# EAGLE board basic-maschinen (EAGLE 6.6.0)
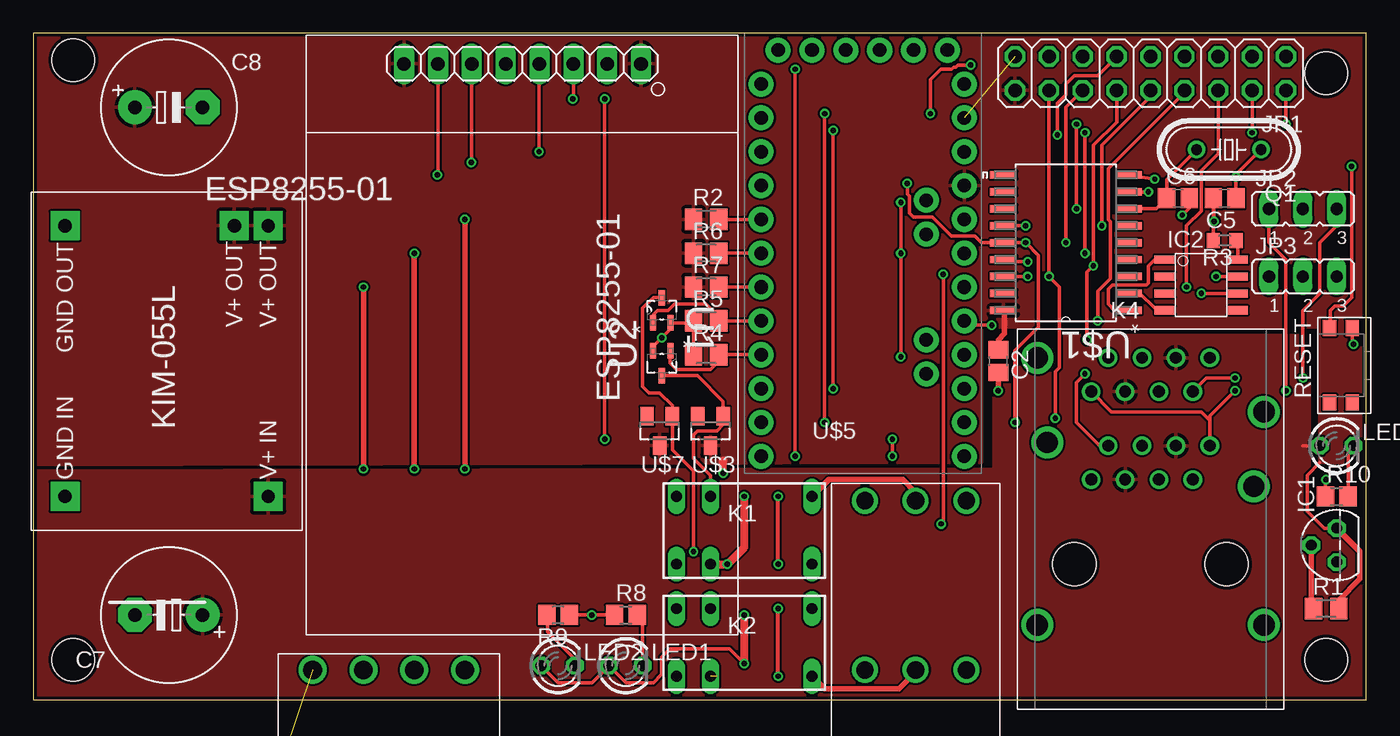
[diagram p0: board, top side]
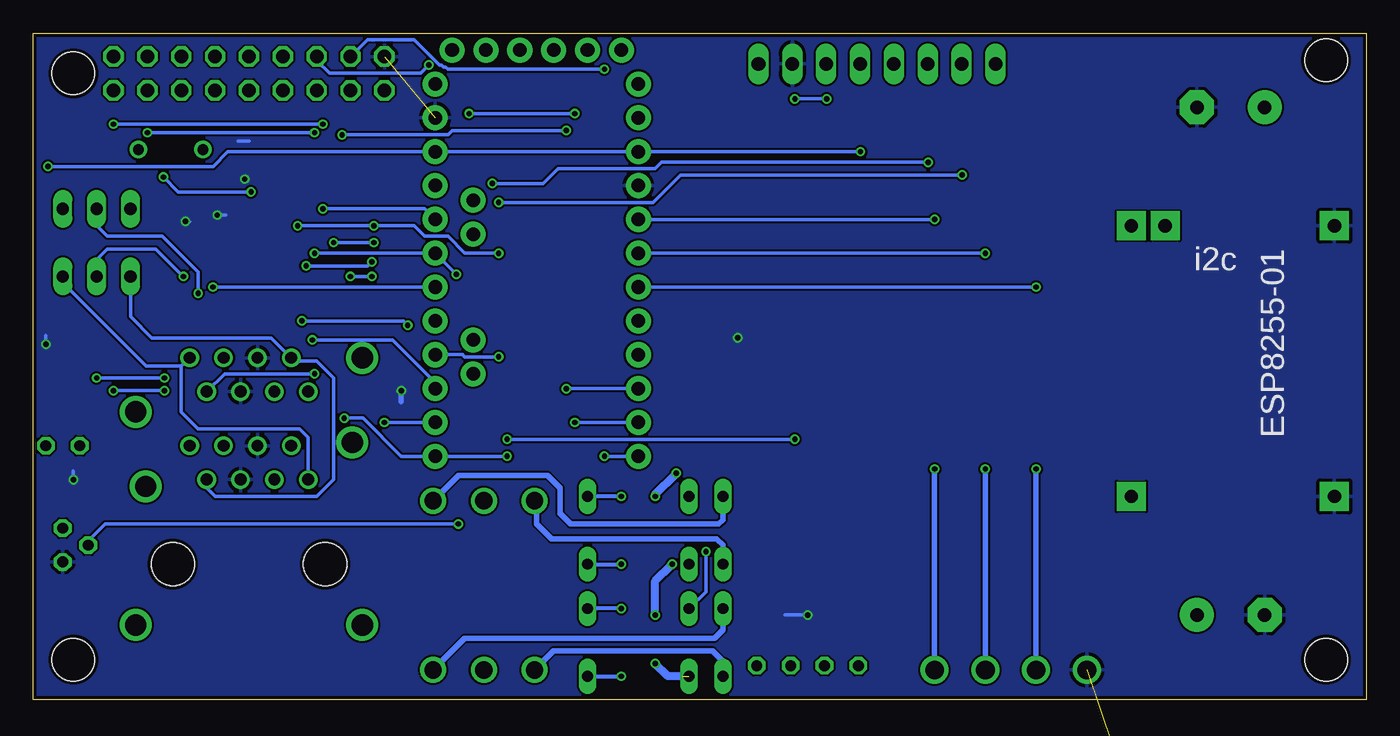
[diagram p1: board, bottom side, seen from below]

Size 100 x 50 mm. Coordinates in mm from the lower left corner, seen from the top.
Outline: 0,50 0,0 100,0 100,50 0,50
Copper layers (1*16): Top 0.035mm / dielectric 1.5mm / Bottom 0.035mm
Design rules "ITEADstudio_DRC": minimum track width 6mil, minimum drill 12mil, track to track 6mil, track to pad 6mil, pad to pad 6mil, via to via 6mil, smd to smd 0mil, copper to edge 10mil, drill to drill 10mil, minimum pad ring 10mil, minimum via ring 6mil, stop-mask expansion 2mil, vias tented up to drill 100mil, thermal gap 10mil
Net classes: 4 USBpair: width 0.254 mm, drill 0.406 mm, clearance 0.508 mm
Holes 3.2 mm at 97,47 97,3 3,3 3,48

## Footprints (pad centres in the part's own frame; a part is rotated, then mirrored left to right if it is on the bottom)
C0805 = smd 1.3 x 1.5: 1 -0.85,0; 2 0.85,0
E5-10,5 = drill 1.016 pad 2.54: + -2.54,0 | drill 1.016 pad 2.54 octagon: - 2.54,0
TO-92 = drill 0.813 pad 1.27 octagon: 1 -1.27,0; 2 0,1.905; 3 1.27,0
SO-8 = smd 0.61 x 1.524: 1 0,-0.203; 2 1.27,-0.203; 3 2.54,-0.203; 4 3.81,-0.203; 5 3.81,5.283; 6 2.54,5.283; 7 1.27,5.283; 8 0,5.283
691327310006 = drill 1.3: 1 0,0; 2 12.7,0; 3 0,3.81; 4 12.7,3.81; 5 0,7.62; 6 12.7,7.62
691322310004 = drill 1.4: 1 -3.81,0; 2 0,0; 3 3.81,0; 4 7.62,0
2X09 = drill 1.016 octagon: 1 -10.16,-1.27; 2 -10.16,1.27; 3 -7.62,-1.27; 4 -7.62,1.27; 5 -5.08,-1.27; 6 -5.08,1.27; 7 -2.54,-1.27; 8 -2.54,1.27; 9 0,-1.27; 10 0,1.27; 11 2.54,-1.27; 12 2.54,1.27; 13 5.08,-1.27; 14 5.08,1.27; 15 7.62,-1.27; 16 7.62,1.27; 17 10.16,-1.27; 18 10.16,1.27
JP2 = drill 0.914 long: 1 -2.54,0; 2 0,0; 3 2.54,0
G5V1 = drill 0.813 long: 1 -5.08,-2.54; 2 -2.54,-2.54; 5 5.08,-2.54; 6 5.08,2.54; 9 -2.54,2.54; 10 -5.08,2.54
615016240521 = drill 0.89: A1 -4.445,-1.27; A2 -3.175,1.27; A3 -1.905,-1.27; A4 -0.635,1.27; A5 0.635,-1.27; A6 1.905,1.27; A7 3.175,-1.27; A8 4.445,1.27; B1 4.445,7.87; B2 3.175,5.33; B3 1.905,7.87; B4 0.635,5.33; B5 -0.635,7.87; B6 -1.905,5.33; B7 -3.175,7.87; B8 -4.445,5.33 | drill 1.6: Z1 -8.505,-12.19; Z2 8.505,-12.19; Z3 7.745,-1.78; Z4 -7.745,1.52; Z5 8.505,3.81; Z6 -8.505,7.87 | hole 3.25: -5.715,-7.62; 5.715,-7.62
LED3MM = drill 0.813 octagon: A -1.27,0; K 1.27,0
KIM-055L = drill 1 pad 2.184 square: GNDIN -10.16,7.62; GNDOUT 10.16,7.62; V+IN -10.16,-7.62; V+OUT1 10.16,-5.08; V+OUT2 10.16,-7.62
HC49/S = drill 0.813: 1 -2.413,0; 2 2.413,0
M0805 = smd 1.3 x 1.6: 1 -0.95,0; 2 0.95,0
R0603 = smd 1 x 1.1: 1 -0.85,0; 2 0.85,0
R0805 = smd 1.3 x 1.5: 1 -0.85,0; 2 0.85,0
434351045816 = smd 1.2 x 1: 1 2.8,0.85; 2 2.8,-0.85; 3 -2.8,0.85; 4 -2.8,-0.85
SOT65P210X110-3N = smd 1.168 x 0.457: 1 -0.94,0.66; 2 -0.94,-0.66; 3 0.94,0
SOIC127P1034X264-18N = smd 1.981 x 0.559: 1 -4.699,5.08; 2 -4.699,3.81; 3 -4.699,2.54; 4 -4.699,1.27; 5 -4.699,0; 6 -4.699,-1.27; 7 -4.699,-2.54; 8 -4.699,-3.81; 9 -4.699,-5.08; 10 4.699,-5.08; 11 4.699,-3.81; 12 4.699,-2.54; 13 4.699,-1.27; 14 4.699,0; 15 4.699,1.27; 16 4.699,2.54; 17 4.699,3.81; 18 4.699,5.08
SOT23 = smd 1 x 1.4: 1 -0.95,-1.1; 2 0.95,-1.1; 3 0,1.1
1.44-128X128 = drill 1.016 long: 1 7.27,2.14; 2 9.81,2.14; 3 12.35,2.14; 4 14.89,2.14; 5 17.43,2.14; 6 19.97,2.14; 7 22.51,2.14; 8 25.05,2.14
ARDUINO_PRO_MINI = drill 1.016 pad 1.88: 1 -7.62,12.7; 2 -7.62,10.16; 3 -7.62,7.62; 4 -7.62,5.08; 5 -7.62,2.54; 6 -7.62,0; 7 -7.62,-2.54; 8 -7.62,-5.08; 9 -7.62,-7.62; 10 -7.62,-10.16; 11 -7.62,-12.7; 12 -7.62,-15.24; 13 7.62,-15.24; 14 7.62,-12.7; 15 7.62,-10.16; 16 7.62,-7.62; 17 7.62,-5.08; 18 7.62,-2.54; 19 7.62,0; 20 7.62,2.54; 21 7.62,5.08; 22 7.62,7.62; 23 7.62,10.16; 24 7.62,12.7; A4 4.763,1.429; A5 4.763,3.969; A6 4.763,-9.049; A7 4.763,-6.509; BLK -6.35,15.24; GND -3.81,15.24; GRN 6.35,15.24; RXI 1.27,15.24; TXO 3.81,15.24; VCC -1.27,15.24

## Placement (x,y rotation side)
C2  [C0805]  72.39,25.4 270 top
C5  [C0805]  89.38,37.62 180 top
C6  [C0805]  85.88,37.62 0 top
C7  [E5-10,5]  10.16,6.35 180 top
C8  [E5-10,5]  10.16,44.45 0 top
IC1  DS1820TO92  [TO-92]  97.79,11.59 90 top
IC2  MCP2551  [SO-8]  85.09,33.02 270 top
J1  [691327310006]  62.39,14.92 270 top
J2  [691322310004]  28.57,2.22 180 top
JP1  [2X09]  83.82,46.99 180 top
JP2  [JP2]  95.25,36.83 0 top
JP3  [JP2]  95.25,31.75 0 top
K1  G5V1  [G5V1]  53.34,12.7 0 top
K2  G5V1  [G5V1]  53.34,4.29 0 top
K4  615016240521  [615016240521]  83.82,17.78 0 top
LED1  [LED3MM]  44.45,2.54 0 top
LED2  [LED3MM]  39.37,2.54 0 top
LED3  [LED3MM]  -2.54,-64.77 0 top  (outside the outline)
LED9  [LED3MM]  97.79,19.05 0 top
MOD1  [KIM-055L]  10,25.4 90 top
Q1  [HC49/S]  89.69,41.27 180 top
R1  [M0805]  97,6.83 0 top
R2  [M0805]  50.48,36.04 0 top
R3  10k  [R0603]  89.38,34.45 180 top
R4  [M0805]  50.48,25.88 0 top
R5  [M0805]  50.48,28.42 0 top
R6  [M0805]  50.48,33.5 0 top
R7  [M0805]  50.48,30.96 0 top
R8  [R0805]  44.45,6.35 0 top
R9  [R0805]  39.37,6.35 180 top
R10  [R0805]  97.79,15.24 0 top
R11  [R0805]  -2.54,-69.85 0 top  (outside the outline)
RESET  434351045816  [434351045816]  98.11,25.08 90 top
U1  BSS138BK  [SOT65P210X110-3N]  47.15,25.24 270 top
U2  BSS138BK  [SOT65P210X110-3N]  47.15,29.21 90 top
U$1  MCP2515-I/SO  [SOIC127P1034X264-18N]  77.47,34.29 180 top
U$3  BAS21  [SOT23]  50.8,20.16 180 top
U$4  1.44-128X128  [1.44-128X128]  52.86,49.85 180 top
U$5  ARDUINO_PRO_MINI  [ARDUINO_PRO_MINI]  62.23,33.5 0 top
U$7  BAS21  [SOT23]  46.99,20.16 180 top

## Library data of the parts
C2 C5-C8 R1 R2 R4-R11 = schlager_passiv
IC1 = schlager_ics
IC2 = MYMCHIP
J1 J2 = Eagle_TERMINAL_BLOCKS_rev16a
JP1 = pinhead
JP2 JP3 = jumper
K1 K2 = relay; MPN: G5V-1-DC24; OC_FARNELL: 9949593; OC_NEWARK: 36M6377
K4 = Wuerth_Elektronik_eiCan_Communication_Connectors
LED1-LED3 LED9 = led
MOD1 = kim055l
Q1 = crystal; OC_FARNELL: 1667008; OC_NEWARK: unknown
R3 = rcl
RESET = Illuminated_Switches
U1 U2 = schlager_transistor; MPN: BSS138BK; OC_FARNELL: 2053833; OC_NEWARK: 61T7486; PACKAGE: SOT-23-3; SUPPLIER: NXP
U$1 = schlager_ics; MPN: MCP2515-I/SO; OC_FARNELL: 1292239; OC_NEWARK: 29H7136; PACKAGE: SOIC-18; SUPPLIER: Microchip
U$3 U$7 = schlager_dioden; MPN: BAS21; OC_ELBE: 01.41.0043.0; OC_FARNELL: 8734267RL; SUPPLIER: NXP
U$4 = schlager_modules
U$5 = SparkFun-Boards

## Nets
1W: IC1.2 JP1.4 R1.1 U$5.19
APA_CLK: JP1.2 U$5.20
APA_DATA: JP1.8 U$5.17
CANH: IC2.7 JP3.2
CANH1: JP3.3 K4.A1 K4.B1
CANH2: JP3.1 K4.A7 K4.B7
CANL: IC2.6 JP2.2
CANL1: JP2.3 K4.A2 K4.B2
CANL2: JP2.1 K4.A8 K4.B8
CANRX: IC2.4 U$1.2
CANTX: IC2.1 U$1.1
D9: U$4.5
GND: C2.2 C5.2 C6.2 C7.- C8.- IC1.1 J2.4 JP1.17 K4.A4 K4.A5 K4.B4 K4.B5 MOD1.GNDIN MOD1.GNDOUT R3.2 R4.1 R5.1 R8.1 R9.1 R10.1 R11.1 RESET.2 U1.2 U2.2 U$1.9 U$4.2 U$5.4 U$5.23
INPUT1: J2.1 R2.2 U$5.5
INPUT2: J2.2 R6.2 U$5.6
INPUT3: J2.3 R7.2 U$5.7
LED_BLUE2: JP1.11 U$5.10
LED_WHITE: JP1.13 U$5.11
LED_WHITE2: JP1.15 U$5.12
MCP_OSC1: C5.1 Q1.1 U$1.8
MCP_OSC2: C6.1 Q1.2 U$1.7
MISO: JP1.12 U$1.15 U$5.15
MOSI: JP1.14 U$1.14 U$4.6 U$5.14
N$1: J1.6 K2.10
N$2: J1.2 K2.1
N$3: J1.4 K2.5 K2.6
N$4: J1.3 K1.5 K1.6
N$5: J1.5 K1.10
N$6: J1.1 K1.1
N$7: IC2.8 R3.1
N$8: K1.9 U1.3 U$3.1
N$9: LED9.K R10.2
N$10: LED1.K R8.2
N$11: LED2.K R9.2
N$12: K2.9 U2.3 U$7.1
N$14: LED3.K R11.2
P5V: C2.1 C8.+ IC1.3 JP1.18 K1.2 K2.2 LED1.A LED2.A MOD1.V+OUT1 MOD1.V+OUT2 R1.2 R2.1 R6.1 R7.1 U$1.18 U$3.3 U$4.1 U$4.8 U$5.21 U$7.3
P24P: C7.+ K4.A3 K4.A6 K4.B3 K4.B6 LED9.A MOD1.V+IN
RELAI1: R5.2 U2.1 U$5.8
RELAI2: R4.2 U1.1 U$5.9
RESET: RESET.1 U$4.4 U$5.3 U$5.22
RX: U$5.2
SCK: JP1.10 U$1.13 U$4.7 U$5.16
SS: JP1.16 U$1.16 U$4.3 U$5.13
TX: U$5.1
WS28: JP1.6 U$5.18

## Tracks (layer width: path | path; a pad name or v marks a point on that pad's centre or on a via)
1W  (via drill 0.4)
  Top 0.254: v68.1,13.18 68.26,13.34 v68.26,31.91 | JP1.4 v91.44,42.55 | v78.9,42.55 v78.9,33.5
  Top 0.406: IC1.2 95.89,6.99 96.52,6.35 R1.1
  Bottom 0.254: IC1.2 95.89,11.91 94.61,13.18 v68.1,13.18 | v91.44,42.55 v78.9,42.55 | v78.9,33.5 U$5.19 v68.26,31.91
APA_CLK  (via drill 0.4)
  Top 0.254: JP1.2 v93.98,43.18 | v78.26,43.18 v78.26,36.83
  Bottom 0.254: v93.98,43.18 v78.26,43.18 | v78.26,36.83 70.64,36.83 U$5.20
APA_DATA  (via drill 0.4)
  Top 0.254: JP1.8 86.36,45.56 80.64,39.85 80.64,36.04 80.8,35.88 80.8,31.59 79.85,30.64 v79.85,28.42 | v71.91,28.1 70.17,28.1 U$5.17
  Bottom 0.254: v79.85,28.42 72.23,28.42 v71.91,28.1
CANH  (via drill 0.4)
  Top 0.254: v88.74,31.75 IC2.7
  Bottom 0.254: JP3.2 95.25,33.02 94.46,33.81 90.81,33.81 v88.74,31.75
CANH1
  Bottom 0.254: K4.A1 79.38,19.68 80.01,20.32 87.63,20.32 88.9,21.59 88.9,25.02 | 88.9,25.02 K4.B1 | 88.9,25.02 91.53,25.02 97.47,30.96 97.47,31.43 JP3.3
CANH2
  Bottom 0.254: K4.A7 87,15.88 86.36,15.24 78.74,15.24 77.47,16.51 77.47,24.13 78.74,25.4 80.39,25.4 K4.B7 82.14,27.15 91.12,27.15 92.71,28.73 JP3.1
CANL  (via drill 0.4)
  Top 0.254: v87.63,30.48 IC2.6
  Bottom 0.254: JP2.2 95.25,35.56 94.46,34.77 90.33,34.77 87.63,32.07 v87.63,30.48
CANL1  (via drill 0.4)
  Top 0.254: K4.A2 80.01,19.05 78.26,20.8 78.26,23.81 v78.9,24.45 | JP2.3 97.79,35.56 96.52,34.29 96.52,30.48 95.25,29.21 v95.25,24.13 | v90.17,24.13 88.02,24.13 K4.B2
  Bottom 0.254: v95.25,24.13 v90.17,24.13 | v78.9,24.45 85.66,24.45 K4.B2
CANL2  (via drill 0.4)
  Top 0.254: K4.A8 88.27,20.95 | 88.27,20.95 87.63,21.59 80.89,21.59 K4.B8 | JP2.1 92.71,34.29 93.98,33.02 v93.98,23.18 | 88.27,20.95 88.27,21.27 v90.17,23.18
  Bottom 0.254: v90.17,23.18 v93.98,23.18
CANRX
  Top 0.254: U$1.2 83.03,30.48 84.14,29.37 84.73,29.37 IC2.4
CANTX
  Top 0.254: U$1.1 81.12,29.21 80.64,29.69 80.64,30.8 80.96,31.11 83.5,31.11 83.66,31.27 83.66,32.54 84.14,33.02 IC2.1
GND  (via drill 0.4)  (2 unrouted)
  Top 0.254: R10.1 96.94,16.45 v97,16.51 | RESET.2 98.96,26.57 v99.06,26.67 | R3.2 C5.2 88.42,37.62 88.42,37.15 88.58,36.99 v88.58,35.88 | U$1.9 v84.14,39.05 | C6.2 86.73,36.89 v86.2,36.35 | R4.1 R5.1 49.39,28.27 U2.2 47.78,28.25 47.78,27.78 v47.15,27.15 46.49,26.49 U1.2 | R9.1 v41.91,6.35 R8.1
  Top 0.406: C2.2 v72.39,23.18
  Bottom 0.254: v97,16.51 97,17.14 | v99.06,26.67 99.06,27.3 | v88.58,35.88 88.27,35.88 | 83.82,41.91 84.61,41.91 | v86.2,36.35 85.57,36.35 | R8.1 v41.91,6.35
  Bottom 0.406: v72.39,23.18 72.39,22.38
  pour Bottom: 111.76,117.95 113.03,-62.39 -3.81,-62.39 -5.08,117.95
INPUT1  (via drill 0.4)
  Top 0.254: R2.2 U$5.5
  Top 0.406: v32.38,17.3 v32.38,36.04
  Bottom 0.254: v32.38,36.04 U$5.5
  Bottom 0.406: J2.1 v32.38,17.3
INPUT2  (via drill 0.4)
  Top 0.254: U$5.6 R6.2
  Top 0.406: v28.57,17.3 v28.57,33.5
  Bottom 0.254: v28.57,33.5 U$5.6
  Bottom 0.406: J2.2 v28.57,17.3
INPUT3  (via drill 0.4)
  Top 0.254: U$5.7 R7.2
  Top 0.406: v24.77,17.3 v24.77,30.96
  Bottom 0.254: v24.77,30.96 U$5.7
  Bottom 0.406: J2.3 v24.77,17.3
LED_BLUE2  (via drill 0.4)
  Top 0.254: v60.01,23.34 v60.01,42.7 | v76.83,42.39 76.83,44.77 77.47,45.4 77.47,46.2 78.11,46.83 79.85,46.83 JP1.11
  Bottom 0.254: U$5.10 v60.01,23.34 | v60.01,42.7 68.58,42.7 68.9,42.39 v76.83,42.39
LED_WHITE  (via drill 0.4)
  Top 0.254: v59.37,20.8 v59.37,43.97 | v70.33,47.62 69.37,47.62 69.22,47.47 69.06,47.47 68.9,47.31 68.1,47.31 67.31,46.51 v67.31,43.97
  Bottom 0.254: U$5.11 v59.37,20.8 | JP1.13 78.74,47.94 77.79,46.99 70.96,46.99 v70.33,47.62 | v67.31,43.97 v59.37,43.97
LED_WHITE2  (via drill 0.4)
  Top 0.254: v57.15,47.31 v57.15,18.26
  Bottom 0.254: JP1.15 74.93,49.53 71.44,49.53 69.53,47.62 69.37,47.62 69.22,47.47 69.06,47.47 68.9,47.31 v57.15,47.31 | v57.15,18.26 U$5.12
MCP_OSC1  (via drill 0.4)
  Top 0.254: C5.1 v90.23,39.21 90.23,39.4 Q1.1 | U$1.8 v83.66,38.1
  Bottom 0.254: v83.66,38.1 89.11,38.1 v90.23,39.21
MCP_OSC2
  Top 0.254: 85.38,39.37 Q1.2 85.03,39.03 C6.1 84.24,36.83 U$1.7
MISO  (via drill 0.4)
  Top 0.254: JP1.12 81.28,43.34 79.53,41.59 v79.53,32.54 79.06,32.07 v79.06,26.99 | v74.61,32.86 72.93,32.86 U$1.15
  Bottom 0.254: v79.53,32.54 74.93,32.54 v74.61,32.86 | v79.06,26.99 73.03,26.99 69.85,23.81 U$5.15
MOSI  (via drill 0.4)
  Top 0.254: JP1.14 77.47,44.45 v77.47,34.29 | v73.66,20.8 73.66,26.19 75.41,27.94 75.41,33.34 v74.45,34.29 U$1.14 71.12,34.29 70.64,34.77 68.9,34.77 67.47,36.2 66.04,36.2 65.72,36.51 65.72,37.78 65.56,37.94 v65.56,38.73 | U$4.6 32.89,40.35 v32.86,40.32
  Bottom 0.254: v77.47,34.29 v74.45,34.29 | U$5.14 v73.66,20.8 | v32.86,40.32 52.86,40.32 53.34,39.85 60.64,39.85 61.75,38.73 v65.56,38.73
N$1
  Bottom 0.406: K2.10 48.26,5.24 48.9,4.6 67.63,4.6 J1.6
N$2
  Bottom 0.406: K2.1 48.26,2.86 49.05,3.65 60.96,3.65 J1.2
N$3  (via drill 0.4)
  Top 0.305: v55.88,1.75 v55.88,6.83
  Top 0.406: J1.4 66.2,2.06 64.93,0.79 59.37,0.79 K2.5
  Bottom 0.305: K2.5 v55.88,1.75 | v55.88,6.83 K2.6
N$4  (via drill 0.4)
  Top 0.305: v55.88,10.16 v55.88,15.24
  Top 0.406: J1.3 66.2,15.56 65.25,16.51 59.69,16.51 K1.6
  Bottom 0.305: K1.5 v55.88,10.16 | v55.88,15.24 K1.6
N$5
  Bottom 0.406: K1.10 48.26,13.49 48.58,13.18 59.69,13.18 60.48,13.97 60.48,15.88 61.44,16.83 68.1,16.83 J1.5
N$6
  Bottom 0.406: K1.1 48.26,11.59 48.74,12.06 61.12,12.06 62.23,13.18 62.23,14.76 J1.1
N$7
  Top 0.254: IC2.8 90.37,34.3 R3.1
N$8
  Top 0.254: U1.3 49.84,24.3 51.75,22.38 U$3.1 51.75,20.64 51.28,20.16 49.85,20.16 49.53,19.84 49.53,18.1 50.8,16.83 K1.9
N$9
  Top 0.254: R10.2 98.64,18.63 LED9.K
N$10
  Top 0.254: LED1.K 45.72,5.93 R8.2
N$11
  Top 0.254: LED2.K 40.64,3.02 38.58,5.08 38.58,6.29 R9.2
N$12  (via drill 0.4)
  Top 0.254: U2.3 47.14,30.16 46.51,30.16 45.72,29.37 45.72,23.5 46.2,23.02 46.99,23.02 47.94,22.07 U$7.1 47.94,18.73 49.53,17.14 v49.53,11.11
  Bottom 0.254: v49.53,11.11 49.53,8.1 K2.9
N$14  (1 unrouted)
P5V  (via drill 0.4)  (1 unrouted)
  Top 0.254: IC1.3 96.84,12.86 95.57,14.13 95.57,16.83 96.52,17.78 | LED2.A 39.37,1.27 41.91,1.27 LED1.A 44.45,1.27 46.51,1.27 47.15,1.91 47.15,3.17 47.78,3.81 52.23,3.81 v53.34,2.7
  Top 0.406: R1.2 97.95,7.46 99.54,9.05 99.54,11.11 IC1.3 | C2.1 72.39,26.99 72.87,27.46 72.87,29.11 U$1.18
  Top 0.61: v53.34,2.7 v53.34,6.35 | K1.2 v52.07,10.16 53.34,11.43 v53.34,15.24 | v51.75,16.99 51.75,17.94
  Bottom 0.61: v53.34,15.24 53.34,15.4 v51.75,16.99 | v53.34,6.35 53.34,8.89 v52.07,10.16 | 51.28,1.75 52.39,1.75 v53.34,2.7
  pour Top: 107.95,117.95 109.22,17.62 96.52,17.78 96.52,27.94 71.12,27.94 71.12,17.78 -3.81,17.62 -5.08,117.95
P24P
  Top 0.254: LED9.A 95.25,19.05
  pour Top: -5.08,17.14 72.07,17.3 72.07,27.3 95.73,27.3 95.73,17.14 113.03,17.14 113.03,-22.86 -5.08,-22.86
RELAI1
  Top 0.254: U$5.8 R5.2 51.43,28.74 50.48,29.69 48.1,29.69 47.62,29.21 46.83,29.21 46.51,28.89 46.51,28.3 U2.1
RELAI2
  Top 0.254: U$5.9 R4.2 51.43,25.4 50.8,24.77 48.26,24.77 47.78,25.24 47.78,26.16 U1.1
RESET  (via drill 0.4)
  Top 0.254: v37.94,41.12 37.94,47.67 U$4.4 | v98.9,40.01 98.9,30.16 98.27,29.53 97.63,29.53 97.31,29.21 97.31,27.94 RESET.1
  Bottom 0.254: v37.94,41.12 U$5.3 U$5.22 85.41,41.12 86.52,40.01 v98.9,40.01
SCK  (via drill 0.4)
  Top 0.254: JP1.10 83.82,45.24 80.17,41.59 v80.17,35.56 | v74.45,35.56 U$1.13 | v65.09,25.72 v65.09,33.5 v65.09,37.31 | U$4.7 30.35,39.4 v30.32,39.37
  Bottom 0.254: v80.17,35.56 v74.45,35.56 71.44,35.56 70.64,34.77 68.9,34.77 67.63,33.5 v65.09,33.5 | U$5.16 67.79,25.88 67.63,25.72 v65.09,25.72 | v30.32,39.37 51.44,39.37 53.5,37.31 v65.09,37.31
SS  (via drill 0.4)
  Top 0.254: JP1.16 v76.2,31.75 76.99,30.96 76.99,24.92 76.68,24.61 v76.68,21.11 | v74.61,31.75 U$1.16 | U$4.3 40.51,45.12 v40.48,45.09 | v42.86,45.09 v42.86,19.53 | v64.45,19.53 v64.45,18.26
  Bottom 0.254: v76.2,31.75 v74.61,31.75 | v76.68,21.11 75.25,21.11 72.39,18.26 U$5.13 v64.45,18.26 | v40.48,45.09 v42.86,45.09 | v42.86,19.53 v64.45,19.53
WS28  (via drill 0.4)
  Top 0.254: JP1.6 88.9,40.96 87.63,39.69 87.63,36.67 86.52,35.56 v86.52,30.96
  Bottom 0.254: v86.52,30.96 U$5.18

## Text on the board
tNames: ESP8255-01 | ESP8255-01
bNames: ESP8255-01 | i2c